# Altium PCB Combiner.PcbDoc
Units mm, origin at the board's own origin, x right, y up, seen from the top; angles counter-clockwise.
Board outline 29.84 x 28.96 mm, 2 copper layers (Top Layer, Bottom Layer), stack 0.871 mm thick; 5 components, 7 nets, 14 pads, 143 vias.
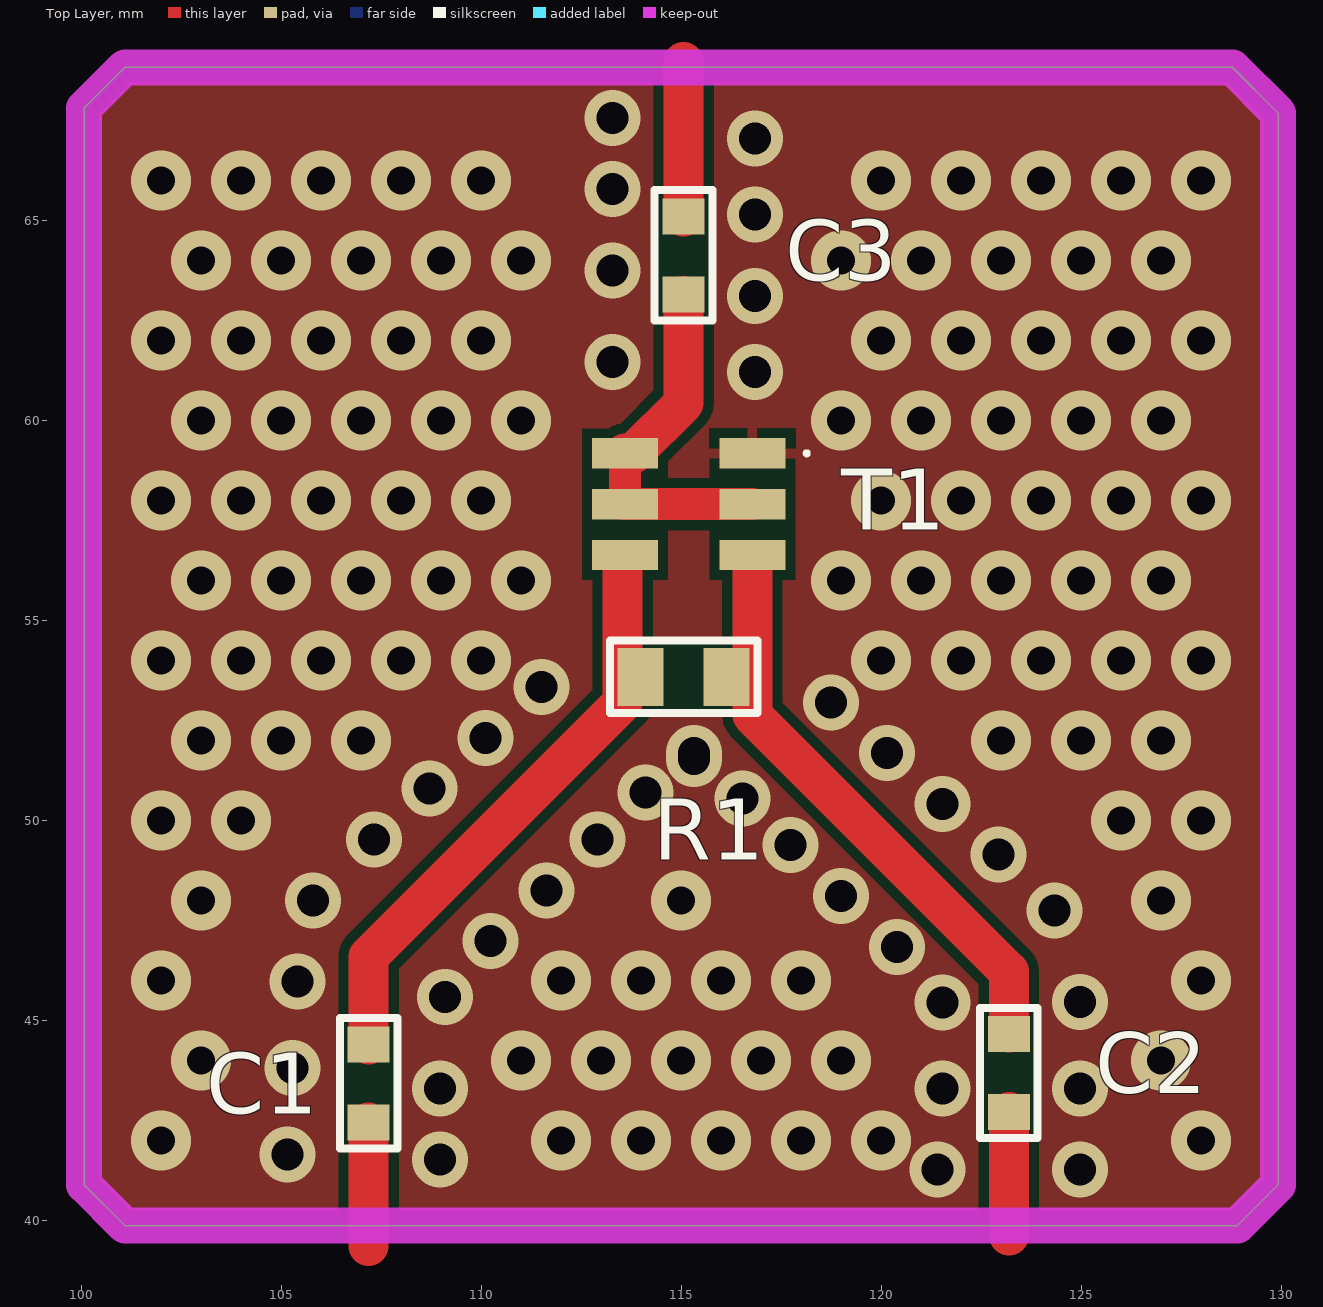
[diagram p0: Top Layer view]
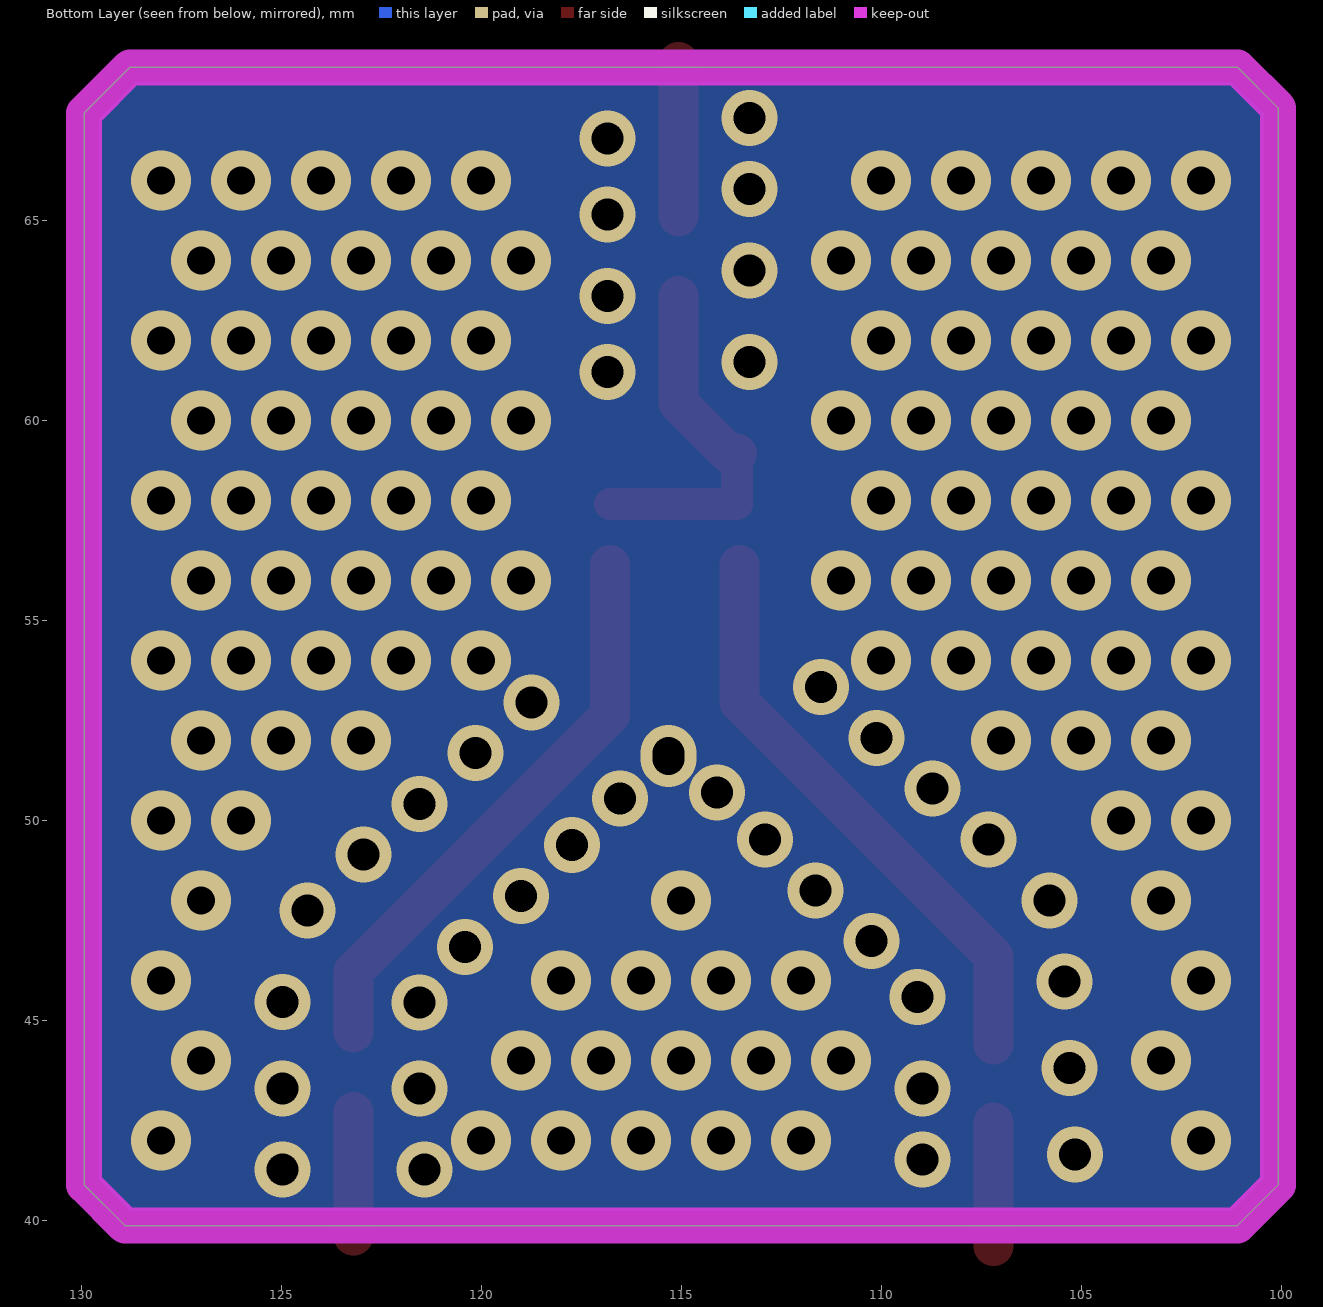
[diagram p1: Bottom Layer view, seen from below]
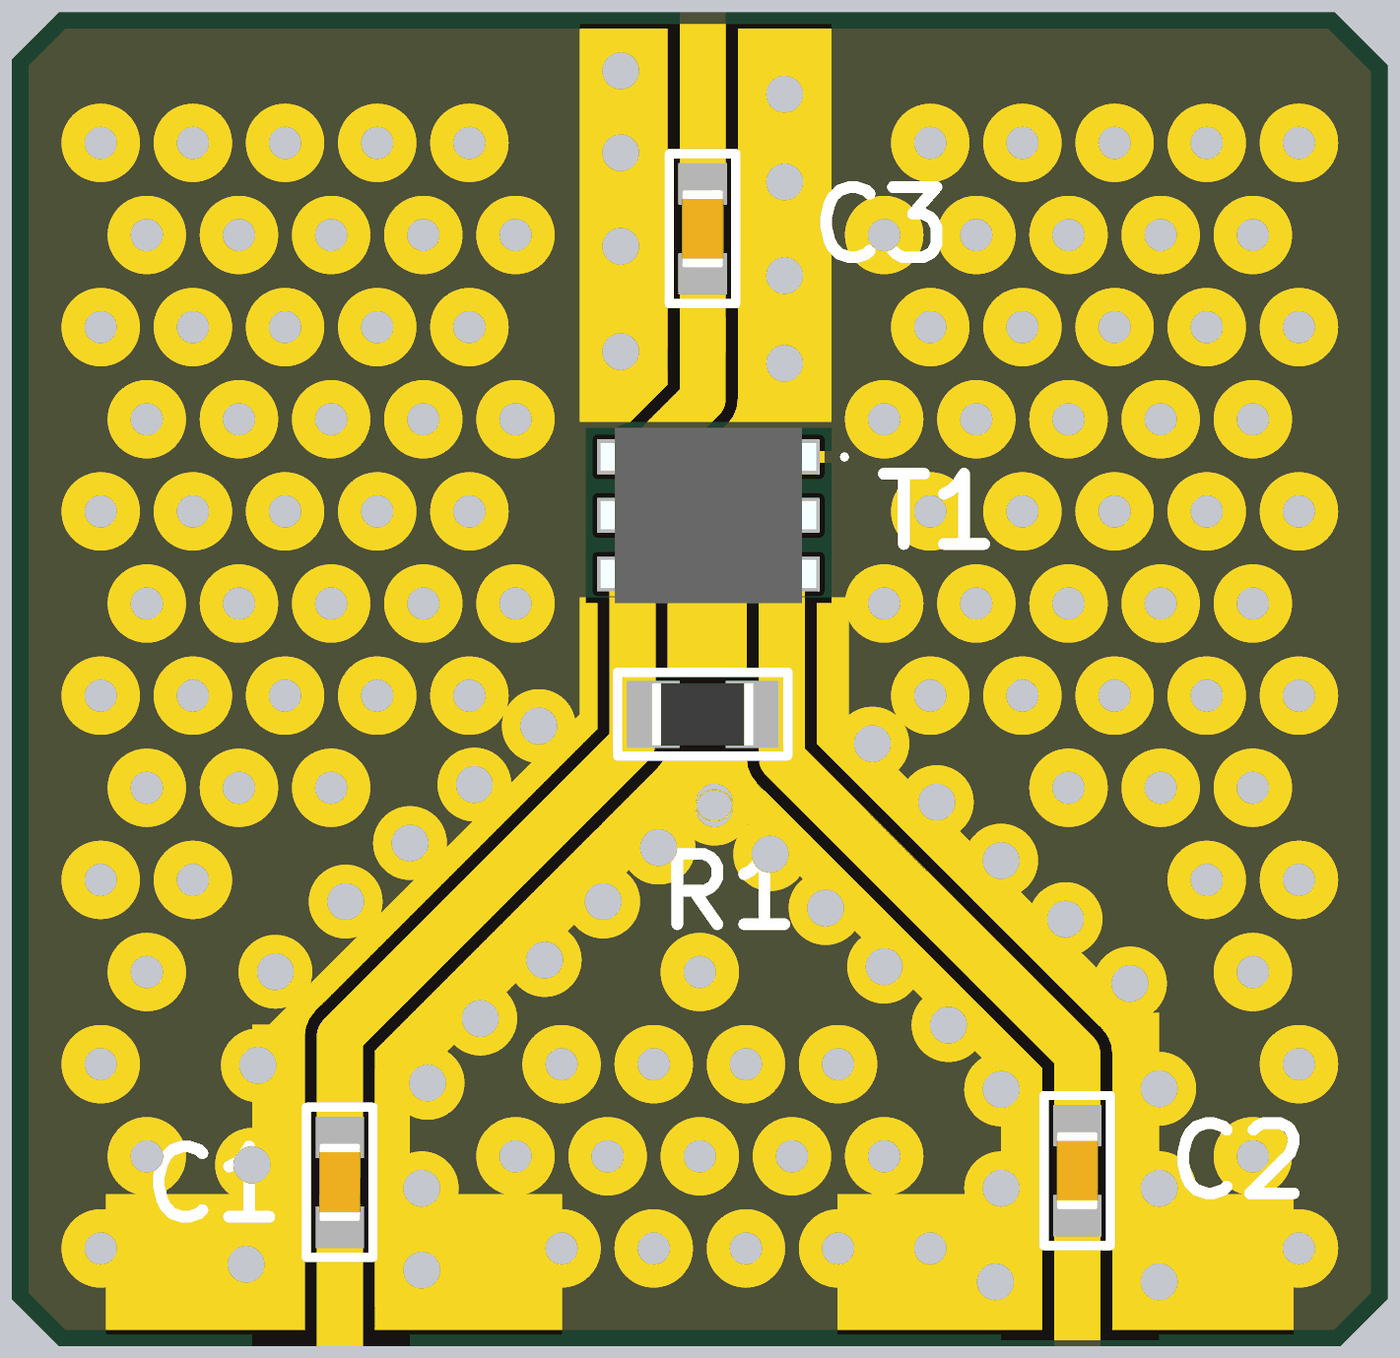
[diagram p2: 3D render of the assembled board from above, using the file's embedded part models]

## Layer stack, top to bottom
Top Solder: solder mask 0.0102, Solder Resist, Dk 3.5
Top Layer: signal copper 0.0356
Dielectric 1: dielectric 0.8, FR-4, Dk 4.8
Bottom Layer: signal copper 0.0356
Bottom Solder: solder mask 0.0102, Solder Resist, Dk 3.5

## Board outline
100.076,40.894 101.092,39.878 128.905,39.878 129.921,40.894 129.921,67.691 128.778,68.834 101.092,68.834 100.076,67.818

## Design rules (kind name [scope] priority, off if disabled: settings)
Clearance Clearance_2 [InNet('GND') vs OnLayer('Keep-Out Layer')] p1: gap=-0.1 ignorepadtopadclearanceinfootprint=FALSE
Clearance Clearance_1 [InNetClass('rf') vs OnLayer('Keep-Out Layer')] p2: gap=-1 ignorepadtopadclearanceinfootprint=FALSE
Clearance [All] p3: gap=0.254 ignorepadtopadclearanceinfootprint=FALSE except(0: Arc-Hole Track-Hole SMDPad-Hole THPad-Hole Via-Hole Fill-Hole Poly-Hole Region-Hole Text-Hole)
PolygonConnect [All] p1: connectstyle=Relief reliefconductorwidth=0.254 reliefentries=4 polygonreliefangle="90 Angle" airgapwidth=0.254
RoutingVias [All] p1: holewidth=0.711 width=1.27 viastyle="Through Hole" minholewidth=0.711 minwidth=1.27 maxholewidth=0.711 maxwidth=1.27
SolderMaskExpansion [All] p1: expansion=0.102 istentingtop=FALSE
Width [All] p1: maxlimit=1.5 minlimit=0.2 preferedwidth=1.1
30 further rules are at their usual default settings.

## Classes and differential pairs
net class rf: p1 p1_1 p2 p2_2 sum

## Components (designator, comment, footprint, x,y, rotation, side; value= is the part's Value field where it differs from the comment)
C1 "1uF" CAPC0603X08M 107.188,43.434 r90 top
C2 "1uF" CAPC0603X08M 123.19,43.688 r90 top
C3 "1uF" CAPC0603X08M 115.062,64.135 r90 top
R1 "475" RESC0805X05M 115.062,53.594 r180 top
T1 "TCP-2-25X+" TCP225X 115.189,57.912 r270 top

## Footprints (in the part's own frame and the unit in brackets; to place one, negate y for a bottom-side part, rotate by r counter-clockwise, add the part's x,y. Pads: shape width x height; smd on the part's side, far side on the other; paste and mask are expansions set on the pad)
CAPC0603X08M [mm] "Chip Capacitor, 2-Leads, Body 1.60x0.80mm, IPC Low Density"
  rect 0.9x1.05 smd: 1(-0.975,0) 2(0.975,0)
  silkscreen extent -1.63,-0.72 1.63,0.72, body extent -0.85,-0.45 0.85,0.45, height 0.8
RESC0805X05M [mm] "Chip Resistor, 2-Leads, Body 2.00x1.25mm, IPC Low Density"
  rect 1.15x1.45 smd: 1(-1.075,0) 2(1.075,0)
  silkscreen extent -1.85,-0.92 1.85,0.9, body extent -1.1,-0.67 1.1,0.68, height 0.5
TCP225X [mm]
  rect 0.76x1.65 smd: 1(-1.27,1.59) 2(0,1.59) 3(1.27,1.59) 4(1.27,-1.59) 5(0,-1.59) 6(-1.27,-1.59)
  silkscreen extent -1.32,2.9 -1.22,3, body extent -1.91,-2.34 1.91,2.34, height 4.16

## Part data
C1 C2 C3: library part Capacitor2P-NP, "The capacitor have 2PIN in AXIAL and SMD models. / all non-polar models include.", Create Date=2022/07/25, Created For=HiroNegarPars, creator="Shahab Azmoodeh", Modified Date=2022/07/25, version=1.0
R1: library part Resistor2P, "The resistors have 2PIN in AXIAL and SMD models. / All wattage include in.", Create Date=2022/07/24, Created For=HiroNegarPars, creator="Shahab Azmoodeh", Modified Date=2022/07/24, version=1.0
T1: "Transformer", Manufacturer_Name=Mini-Circuits, Mouser Part Number=139-TCP-2-25X, Datasheet Link=https://componentsearchengine.com/Datasheets/1/TCP-2-25X+.pdf, Height=4.06mm, Manufacturer_Part_Number=TCP-2-25X+, Mouser Price/Stock=https://www.mouser.com/Search/Refine.aspx?Keyword=139-TCP-2-25X

## Via types
v1: diameter 1.5, hole 0.7, Top Layer to Bottom Layer, 103 vias
v2: diameter 1.4, hole 0.8, Top Layer to Bottom Layer, 40 vias

## Nets (pads, with @x,y where several pads share a name; then routed paths per layer and width w, separated by ;. In a path a pad name is that pad's centre, name@x,y a point inside that pad or via, vN(x,y) a via of type N, cw(c..) or ccw(c..) an arc to the next point about the centre after c; other vN are vias at no path point)
GND: T1.1
  other v1: 102,42 112,42 114,42 116,42 118,42 120,42 128,42 103,44 111,44 113,44 115,44 117,44 119,44 127,44 102,46 112,46 114,46 116,46 118,46 128,46 103,48 115,48 127,48 102,50 104,50 126,50 128,50 103,52 105,52 107,52 123,52 125,52 127,52 102,54 104,54 106,54 108,54 110,54 120,54 122,54 124,54 126,54 128,54 103,56 105,56 107,56 109,56 111,56 119,56 121,56 123,56 125,56 127,56 102,58 104,58 106,58 108,58 110,58 120,58 122,58 124,58 126,58 128,58 103,60 105,60 107,60 109,60 111,60 119,60 121,60 123,60 125,60 127,60 102,62 104,62 106,62 108,62 110,62 120,62 122,62 124,62 126,62 128,62 103,64 105,64 107,64 109,64 111,64 119,64 121,64 123,64 125,64 127,64 102,66 104,66 106,66 108,66 110,66 120,66 122,66 124,66 126,66 128,66
  other v2: 121.412,41.275 124.968,41.275 108.966,41.529 105.156,41.656 108.966,43.307 121.539,43.307 124.968,43.307 105.283,43.815 121.539,45.451 124.968,45.466 109.093,45.593 105.41,45.974 120.396,46.848 110.236,46.99 124.333,47.752 105.791,48.006 118.999,48.118 111.633,48.26 122.936,49.149 117.729,49.388 107.315,49.53 112.903,49.53 121.539,50.419 116.527,50.559 114.105,50.701 108.712,50.8 115.316,51.547 115.316,51.689 120.142,51.689 110.109,52.07 118.745,52.959 111.506,53.34 116.84,61.214 113.284,61.468 116.84,63.119 113.284,63.754 116.84,65.151 113.284,65.786 116.84,67.056 113.284,67.564
NetC3_1: C3.1 T1.2 T1.5 T1.6 | length 9.1
  Top Layer w0.8: T1.6 T1.5 T1.2
  Top Layer w1: T1.6 113.804,59.182 115.062,60.44 C3.1@115.062,63.119
p1: C2.2 R1.1 T1.3 | length 14.3
  Top Layer w1: T1.3@116.779,56.388 116.779,52.639 123.19,46.228 C2.2@123.19,44.704
p1_1: C2.1 | length 3.1
  Top Layer w1: 123.19,39.624 C2.1
p2: C1.2 R1.2 T1.4 | length 14.6
  Top Layer w1: C1.2 107.188,46.609 113.538,52.959 113.538,53.594 T1.4@113.538,56.388
p2_2: C1.1 | length 3.1
  Top Layer w1: 107.188,39.37 C1.1
sum: C3.2 | length 3.9
  Top Layer w1: C3.2 115.062,68.961

## Polygon pours and split planes (outlines as drawn)
GND on Bottom Layer "GND_L02_P001" (solid, pour order 1): 100.076,40.894 101.092,39.878 128.905,39.878 129.921,40.894 129.921,67.691 128.778,68.834 101.092,68.834 100.076,67.818
GND on Top Layer "GND_L01_P002" (solid, pour order 2): 100.076,40.894 100.076,67.818 101.092,68.834 128.778,68.834 129.921,67.691 129.921,40.894 128.905,39.878 101.092,39.878

## Keep-outs
Keep-Out Layer:
  the board outline again, w0.9

## Other copper
Top Layer:
  pour cut-out: 114.3,64.643 115.824,64.643 115.824,63.627 114.3,63.627
  pour cut-out: 115.57,54.483 115.57,52.705 114.554,52.705 114.554,54.483
  pour cut-out: 123.952,43.18 122.428,43.18 122.428,44.196 123.952,44.196
  pour cut-out: 107.95,42.926 106.426,42.926 106.426,43.942 107.95,43.942

## Silkscreen, mask and mechanical layers (free items; w line width, h text height)
Top Solder:
  rectangle: 102.108,40.132 112.014,43.18
  rectangle: 117.983,40.132 127.889,43.18
  rectangle: 112.395,59.944 117.856,68.58
  region: 115.379,52.134 113.157,54.356 105.537,46.736 107.759,44.514
  region: 108.712,46.863 105.283,46.863 105.283,39.751 108.712,39.751
  rectangle: 121.539,40.005 124.968,47.117
  region: 122.492,44.768 124.714,46.99 117.094,54.61 114.872,52.388
  rectangle: 112.395,52.324 118.237,56.134